# Altium PCB MJ_GPS-AT6558 V1.0.PcbDoc
Units mil, origin at the board's own origin, x right, y up, seen from the top; angles counter-clockwise.
Board outline 511.81 x 625.98 mil, 4 copper layers (Top Layer, GND, POWER, Bottom Layer), stack 30.709 mil thick; 29 components, 24 nets, 250 pads, 46 vias.
Unrouted connection lines stored in the file: 3.
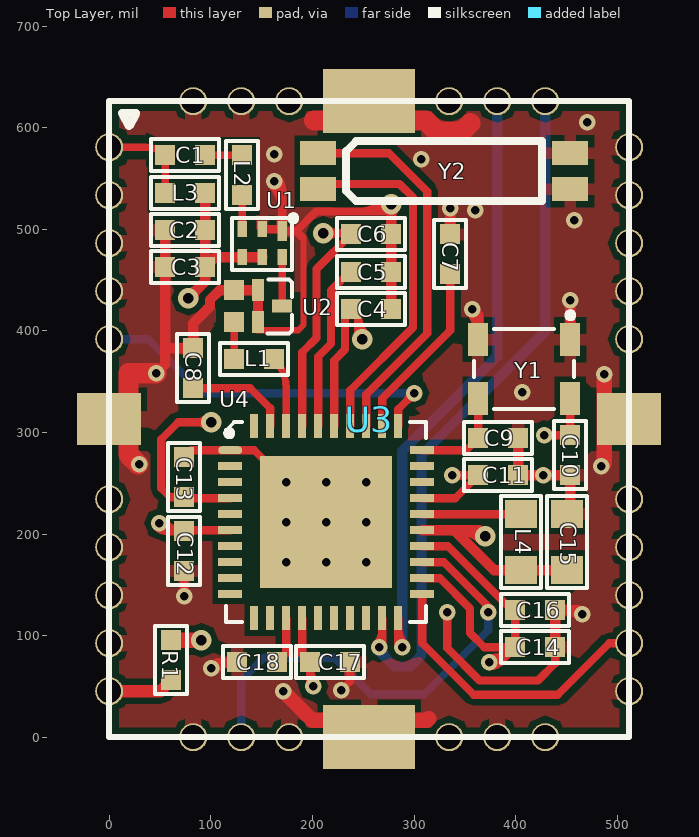
[diagram p0: Top Layer view]
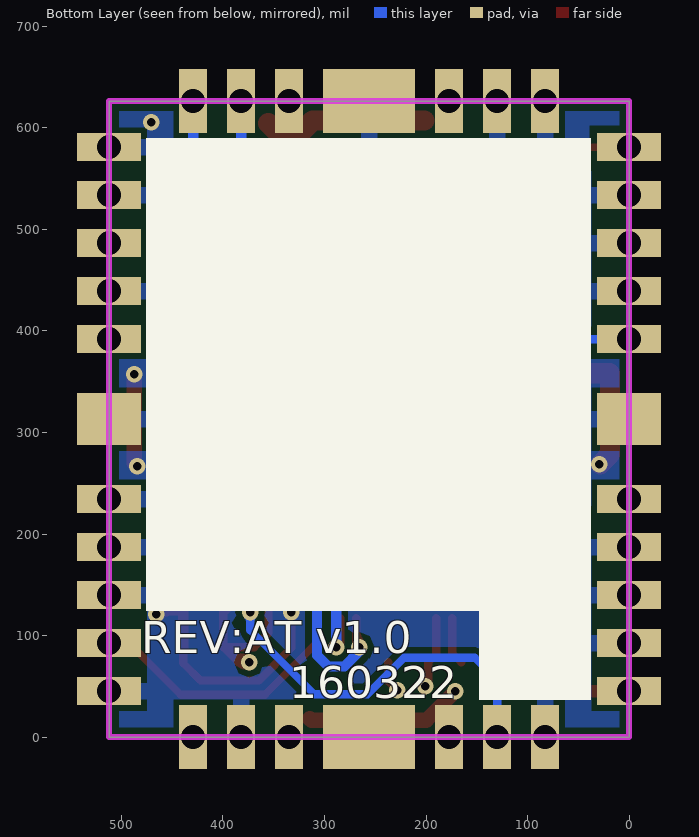
[diagram p1: Bottom Layer view, seen from below]
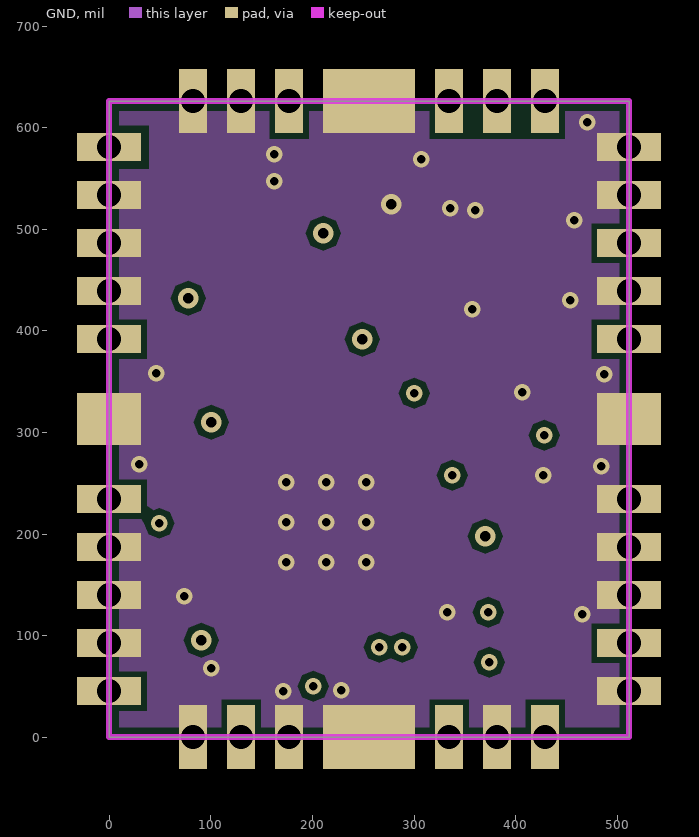
[diagram p2: GND]
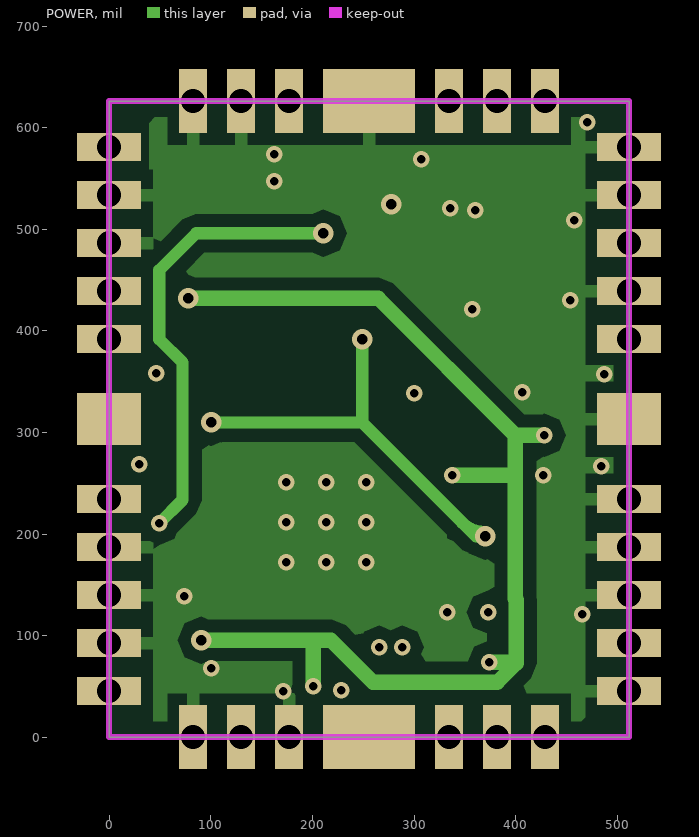
[diagram p3: POWER]

## Layer stack, top to bottom
Top Layer: signal copper 1.378
Dielectric: core 4.7244, FR-4, Dk 4.3
GND: signal copper 1.378
Dielectric: prepreg 15.748, FR-4, Dk 4.8
POWER: signal copper 1.378
Dielectric: core 4.7244, FR-4, Dk 4.3
Bottom Layer: signal copper 1.378

## Board outline
0,0 0,625.98 511.81,625.98 511.81,0

## Design rules (kind name [scope] priority, off if disabled: settings)
Clearance U4 [(InComponent('U4'))] p1: gap=6
Clearance "clearnce 50ohm" [(InNet('RF_IN') OR InNet('NetC1_2') OR InNet('NetL2_1') Or InNet('NetU1_6') Or InNet('NetL1_2') Or InNet('RFA_IN'))] p2: gap=7.87
Clearance KEEP-GND [(InComponent('U3')) vs OnLayer('Keep-Out Layer')] p3: gap=0
Clearance POWER [OnLayer('POWER')] p4: gap=11.81
Clearance [All] p5: gap=6
ComponentClearance [All] p1 off: gap=10 collisioncheckmode=3 verticalgap=10 showdistances=FALSE
Height [All] p1 off: minheight=0 maxheight=1000 prefheight=500
HoleToHoleClearance [All] p1: gap=7.87 allowstackedmicrovias=TRUE
MinimumSolderMaskSliver [All] p1 off: minsoldermaskwidth=7.87
NetAntennae [All] p1 off: netantennaetolerance=0
PolygonConnect GND [OnLayer('GND')] p1: connectstyle=Direct reliefconductorwidth=10 reliefentries=4 polygonreliefangle="90 Angle"
PolygonConnect isvia [IsVia vs InNet('GND')] p2: connectstyle=Direct reliefconductorwidth=10 reliefentries=4 polygonreliefangle="90 Angle"
PolygonConnect "Bottom Lyayer_GND" [InNet('GND') vs OnLayer('Bottom Layer')] p3: connectstyle=Relief reliefconductorwidth=15.75 reliefentries=4 polygonreliefangle="90 Angle"
PolygonConnect U3 [(InComponent('U3')) vs InNet('GND')] p4: connectstyle=Relief reliefconductorwidth=15.75 reliefentries=4 polygonreliefangle="90 Angle"
PolygonConnect [All] p5: connectstyle=Relief reliefconductorwidth=11.81 reliefentries=4 polygonreliefangle="90 Angle"
RoutingVias [All] p1: holewidth=8 width=16 viastyle="Through Hole" minholewidth=8 minwidth=16 maxholewidth=28 maxwidth=50
SilkToSilkClearance [All] p1 off: silktosilkclearance=10
SilkscreenOverComponentPads [All] p1 off: minsilkscreentomaskgap=10
SolderMaskExpansion [All] p1: expansion=1.97
Width RF_50ohm [(InNet('RF_IN') OR InNet('NetC1_2') OR InNet('NetL2_1') Or InNet('NetU1_6') Or InNet('NetL1_2') Or InNet('RFA_IN'))] p1: maxlimit=7 minlimit=7 preferedwidth=7
Width [All] p2: maxlimit=20 minlimit=6 preferedwidth=6
21 further rules are at their usual default settings.

## Components (designator, comment, footprint, x,y, rotation, side; value= is the part's Value field where it differs from the comment)
C1 "470pF/50V C0G" 0402 74.8,572.83 r0 top
C2 "100nF/25V X5R" 0402 74.8,499.02 r180 top
C3 "100nF/25V X5R" 0402 74.8,462.6 r0 top
C4 "1uF/10V X5R" 0402 257.87,421.26 r0 top
C5 "1uF/10V X5R" 0402 257.88,457.68 r180 top
C6 "1uF/10V X5R" 0402 257.88,495.08 r0 top
C7 "1uF/10V X5R" 0402 335.63,475.39 r90 top
C8 "1uF/10V X5R" 0402 82.68,363.19 r270 top
C9 "10pF/50V C0G/NC" 0402 382.87,294.29 r0 top
C10 "100nF/25V X5R" 0402 453.74,277.56 r270 top
C11 "1uF/10V X5R" 0402 382.87,257.87 r180 top
C12 "1uF/10V X5R" 0402 73.82,183.07 r270 top
C13 "100nF/25V X5R" 0402 73.82,255.91 r90 top
C14 "100nF/25V X5R" 0402 419.29,88.58 r0 top
C15 "10uF/6.3V X5R" 0603 450.79,191.93 r270 top
C16 "1uF/10V X5R" 0402 419.29,125 r180 top
C17 "1uF/10V X5R" 0402 217.52,73.82 r0 top
C18 "100nF/25V X5R" 0402 145.67,73.82 r180 top
L1 "4.3nH" 0402 142.72,372.05 r180 top
L2 "5.6nH" 0402 130.91,553.15 r90 top
L3 "47nH" 0402 74.8,535.43 r0 top
L4 "CIG10W4R7MNC/LQM18PN4R7MFR" 0603 405.51,191.93 r90 top
R1 "0R" 0402 61.02,75.79 r270 top
U1 "LX2659" dfn-6 150.59,486.22 r270 top
U2 "FAR-F6KA-1G5754-L4AJ" s1365 170.28,424.21 r180 top
U3 "MODULE-1613" MODULE-1613 255.91,312.99 r270 top locked
U4 "AT6558" AT6558 213.58,211.61 r0 top locked
Y1 "26MHZ" JZ_TCXO2520 408.46,362.21 r180 top
Y2 "32.768KHZ" JZ-MC146 329.72,557.09 r0 top

## Footprints (in the part's own frame and the unit in brackets; to place one, negate y for a bottom-side part, rotate by r counter-clockwise, add the part's x,y. Pads: shape width x height; smd on the part's side, far side on the other; paste and mask are expansions set on the pad)
0402 [mm]
  rect 0.5x0.5 smd: 1(-0.5,0) 2(0.5,0)
  silkscreen extent -0.85,-0.4 0.85,0.4
0603 [mm]
  rect 0.7x0.8 smd: 1(-0.7,0) 2(0.7,0)
  silkscreen extent -1.15,-0.5 1.15,0.5
AT6558 [mm]
  rect 3.3x3.3 smd: 0(0,0)
  oval 0.6x0.2 smd: 1(-2.4,1.8)
  rect 0.6x0.2 smd: 2(-2.4,1.4) 3(-2.4,1) 4(-2.4,0.6) 5(-2.4,0.2) 6(-2.4,-0.2) 7(-2.4,-0.6) 8(-2.4,-1) 9(-2.4,-1.4) 10(-2.4,-1.8) 21(2.4,-1.8) 22(2.4,-1.4) 23(2.4,-1) 24(2.4,-0.6) 25(2.4,-0.2) 26(2.4,0.2) 27(2.4,0.6) 28(2.4,1) 29(2.4,1.4) 30(2.4,1.8)
  rect 0.2x0.6 smd: 11(-1.8,-2.4) 12(-1.4,-2.4) 13(-1,-2.4) 14(-0.6,-2.4) 15(-0.2,-2.4) 16(0.2,-2.4) 17(0.6,-2.4) 18(1,-2.4) 19(1.4,-2.4) 20(1.8,-2.4) 31(1.8,2.4) 32(1.4,2.4) 33(1,2.4) 34(0.6,2.4) 35(0.2,2.4) 36(-0.2,2.4) 37(-0.6,2.4) 38(-1,2.4) 39(-1.4,2.4) 40(-1.8,2.4)
  silkscreen extent -2.5,-2.5 2.5,2.5
dfn-6 [mm]
  rect 0.5x0.23 smd: 1(-0.3,0.5)
  rect 0.4x0.23 smd: 2(-0.35,0) 3(-0.35,-0.5) 5(0.35,0) 6(0.35,0.5)
  rect 0.4x0.23 smd mask+0.05: 4(0.35,-0.5)
  silkscreen extent -0.7,-0.75 0.68,0.85
JZ-MC146 [mm]
  rect 0.9x0.6 smd: 1(-3.15,-0.45) 2(3.15,-0.45) 3(3.15,0.45) 4(-3.15,0.45)
  silkscreen extent -2.45,-0.75 2.45,0.75
JZ_TCXO2520 [mm]
  rect 0.5x0.825 smd: 1(-1.15,-0.737) 2(1.15,-0.737) 3(1.15,0.737) 4(-1.15,0.737)
  silkscreen extent -1.25,-1.42 1.25,1
MODULE-1613 [mm]
  rect 0.7x1.6 smd far side: 1(-6.8,-6.5) 2(-5.6,-6.5) 3(-4.4,-6.5) 4(-3.2,-6.5) 5(-2,-6.5) 7(2,-6.5) 8(3.2,-6.5) 9(4.4,-6.5) 10(5.6,-6.5) 11(6.8,-6.5) 19(6.8,6.5) 20(5.6,6.5) 21(4.4,6.5) 22(3.2,6.5) 23(2,6.5) 25(-2,6.5) 26(-3.2,6.5) 27(-4.4,6.5) 28(-5.6,6.5) 29(-6.8,6.5)
  round 0.7 hole 0.6: 1(-6.8,-6.5) 2(-5.6,-6.5) 3(-4.4,-6.5) 4(-3.2,-6.5) 5(-2,-6.5) 7(2,-6.5) 8(3.2,-6.5) 9(4.4,-6.5) 10(5.6,-6.5) 11(6.8,-6.5) 12(7.95,-4.4) 13(7.95,-3.2) 14(7.95,-2) 16(7.95,2) 17(7.95,3.2) 18(7.95,4.4) 19(6.8,6.5) 20(5.6,6.5) 21(4.4,6.5) 22(3.2,6.5) 23(2,6.5) 25(-2,6.5) 26(-3.2,6.5) 27(-4.4,6.5) 28(-5.6,6.5) 29(-6.8,6.5) 30(-7.95,4.4) 31(-7.95,3.2) 32(-7.95,2) 34(-7.95,-2) 35(-7.95,-3.2) 36(-7.95,-4.4)
  rect 1.3x1.6 smd: 6(0,-6.5) 24(0,6.5)
  rect 1.3x1.6 smd far side: 6(0,-6.5) 24(0,6.5)
  rect 1.6x0.7 smd far side: 12(7.95,-4.4) 13(7.95,-3.2) 14(7.95,-2) 16(7.95,2) 17(7.95,3.2) 18(7.95,4.4) 30(-7.95,4.4) 31(-7.95,3.2) 32(-7.95,2) 34(-7.95,-2) 35(-7.95,-3.2) 36(-7.95,-4.4)
  rect 1.6x2.3 smd: 15(7.95,0) 33(-7.95,0)
  rect 1.6x2.3 smd far side: 15(7.95,0) 33(-7.95,0)
  silkscreen extent -7.95,-6.5 7.95,6.5
s1365 [mm]
  rect 0.5x0.325 smd mask+0.05: 1(0,0)
  rect 0.3x0.55 smd mask+0.05: 2(0.61,-0.4) 5(0.61,0.4)
  rect 0.5x0.5 smd mask+0.05: 3(1.21,-0.4) 4(1.21,0.4)
  silkscreen extent -0.25,-0.66 0.36,0.68

## Part data
C1 C2 C3 C4 C5 C6 C7 C8 C9 C10 C11 C12 C13 C14 C15 C16 C17 C18: library part CB
L1 L2 L3: library part L1
L4: library part L1, "SAMSUNG/MURATA"
R1: library part R
U2: library part "SAW FILTER 1575"
U4: "AT6558 QFN40 5*5*0.8"
Y1: library part XTAL

## Free pads (board coordinates)
  rect 62.99x27.56 on Mid1: 1(0,580.71) 2(0,533.46) 3(0,486.22) 4(0,438.98) 5(0,391.73) 7(0,234.25) 8(0,187.01) 9(0,139.76) 10(0,92.52) 11(0,45.28) 19(511.81,45.28) 20(511.81,92.52) 21(511.81,139.76) 22(511.81,187.01) 23(511.81,234.25) 25(511.81,391.73) 26(511.81,438.98) 27(511.81,486.22) 28(511.81,533.46) 29(511.81,580.71)
  rect 62.99x27.56 on Mid2: 1(0,580.71) 2(0,533.46) 3(0,486.22) 4(0,438.98) 5(0,391.73) 7(0,234.25) 8(0,187.01) 9(0,139.76) 10(0,92.52) 11(0,45.28) 19(511.81,45.28) 20(511.81,92.52) 21(511.81,139.76) 22(511.81,187.01) 23(511.81,234.25) 25(511.81,391.73) 26(511.81,438.98) 27(511.81,486.22) 28(511.81,533.46) 29(511.81,580.71)
  rect 62.99x51.18 on Mid1: 6(0,312.99) 24(511.81,312.99)
  rect 62.99x51.18 on Mid2: 6(0,312.99) 24(511.81,312.99)
  rect 27.56x62.99 on Mid1: 12(82.68,0) 13(129.92,0) 14(177.17,0) 16(334.65,0) 17(381.89,0) 18(429.13,0) 30(429.13,625.98) 31(381.89,625.98) 32(334.65,625.98) 34(177.17,625.98) 35(129.92,625.98) 36(82.68,625.98)
  rect 27.56x62.99 on Mid2: 12(82.68,0) 13(129.92,0) 14(177.17,0) 16(334.65,0) 17(381.89,0) 18(429.13,0) 30(429.13,625.98) 31(381.89,625.98) 32(334.65,625.98) 34(177.17,625.98) 35(129.92,625.98) 36(82.68,625.98)
  rect 90.55x62.99 on Mid1: 15(255.91,0) 33(255.91,625.98)
  rect 90.55x62.99 on Mid2: 15(255.91,0) 33(255.91,625.98)

## Via types
v1: diameter 16, hole 8, Top Layer to Bottom Layer, 39 vias
v2: diameter 20, hole 10, Top Layer to Bottom Layer, 7 vias

## Nets (pads, with @x,y where several pads share a name; then routed paths per layer and width w, separated by ;. In a path a pad name is that pad's centre, name@x,y a point inside that pad or via, vN(x,y) a via of type N, cw(c..) or ccw(c..) an arc to the next point about the centre after c; other vN are vias at no path point)
1.2V: C18.1 U4.13 | length 47
  Top Layer w8: C18.1 174.21,82.68 U4.13
1PPS: pad.20 U3.20 U4.21 | length 281
  Top Layer w8: U4.21 308.07,92.54 358.79,41.82 441.43,41.82 492.13,92.52 U3.20@498.86,92.52
+3.3V: pad.11 R1.2 U3.11 | length 65.5
  Top Layer w12: U3.11@0,45.28 50.2,45.28 R1.2
AVDD: C6.1 C12.1 U4.6 U4.37 | length 813.3
  Top Layer w8: v1@46.08,208.14 ccw(c57.24,217.01) 57.24,202.76 ; v1(49.21,210.63) 57.09,202.76 C12.1 cw(c73.82,230.18) v1@52.34,213.12 ; C12.1@74.8,203.74 U4.6 ; U4.37 189.96,378.94 204.12,393.09 204.12,461.01 C6.1 ; v2(210.63,496.06) C6.1@238.19,496.06 ; v2@214.87,491.82 cw(c225.12,481.58) 225.12,496.06 cw(c225.12,510.55) v2@214.87,500.31
  POWER w12: v1(49.21,210.63) 72.07,233.49 72.07,368.98 49.31,391.74 49.31,459.74 85.63,496.06 v2(210.63,496.06)
G_RX: pad.31 U3.31 U4.20 | length 624.5
  Top Layer w8: U4.20@284.45,107.75 ccw(c307.55,107.75) v1@291.21,91.41 ; U4.20 284.45,92.52 v1(288.39,88.58)
  Bottom Layer w10: v1(288.39,88.58) 288.39,281.5 381.89,375 U3.31@381.89,625.98
G_TX: pad.30 U3.30 U4.19 | length 711.3
  Top Layer w8: v1@262.92,91.41 ccw(c248.97,105.36) U4.19@268.7,105.36 ; v1(265.75,88.58) 268.7,91.53 U4.19
  Bottom Layer w10: v1(265.75,88.58) 265.75,84.35 280.52,69.58 296.26,69.58 307.39,80.71 307.39,277.87 429.13,399.62 U3.30@429.13,625.98 ; v1@268.75,88.58 ccw(c286.21,88.58) 273.86,76.24
GND: C2.2 C3.1 C4.2 C5.1 C6.2 C7.2 C8.1 C9.2 C10.2 C11.1 C12.2 C13.2 C14.2 C15.1 C16.1 C17.2 C18.2 pad.2 pad.3 pad.4 pad.6 pad.8 pad.9 pad.10 pad.12 pad.14 pad.15 pad.17 pad.19 pad.21 pad.22 pad.23 pad.24 pad.26 pad.28 pad.29 pad.33 pad.35 pad.36 U1.1 U1.2 U2.2 U2.3 U2.5 U3.2 U3.3 U3.4 U3.6 U3.8 U3.9 U3.10 U3.12 U3.14 U3.15 U3.17 U3.19 U3.21 U3.22 U3.23 U3.24 U3.26 U3.28 U3.29 U3.33 U3.35 U3.36 U4.0 U4.1 Y1.1 Y1.2 Y2.2 Y2.3 | length 2239
  Top Layer w6: U2.5@145.67,400.59 186.02,400.59 191.12,405.68 191.12,490.97
  Top Layer w8: v1@70.99,141.61 ccw(c64.16,148.44) 73.82,148.44 ccw(c83.48,148.44) v1@76.65,141.61 ; v1(73.82,138.78) C12.2 ; C13.2 80.71,282.48 U4.1 142.71,282.48 v1(213.58,211.61) ; v1(100.39,67.91) 106.3,73.82 C18.2 ; v1@103.22,65.09 cw(c124.31,44) C18.2@124.31,73.82 ; U2.5 U2.5@146.91,407.82 ; U1.2 U1.1@168.31,500 ; v1@159.57,544.42 cw(c133.74,518.58) 170.28,518.58 ; v1(162.4,547.24) 170.28,539.37 U1.1 ; v1@165.23,550.07 cw(c153.05,537.89) 170.28,537.89 ; U4.0@170.21,250.98 ccw(c160.55,250.98) 167.38,257.81 ccw(c174.21,264.64) U4.0@174.21,254.98 ; U1.1@171.23,498.03 184.06,498.03 ; U4.0@174.21,246.98 cw(c174.21,237.33) 181.04,244.16 cw(c187.87,250.98) U4.0@178.21,250.98 ; 190.12,491.97 184.06,498.03 ; U4.0@209.58,211.61 ccw(c199.92,211.61) 206.75,218.44 ccw(c213.58,225.27) U4.0@213.58,215.61 ; v1(228.36,46.26) 237.2,55.11 C17.2 ; 246.06,517.56 ccw(c246.06,556.1) v2@273.32,528.85 ; 265.38,517.56 ccw(c265.38,536.79) v2@278.97,523.19 ; v2(277.56,524.61) 270.51,517.56 203.58,517.56 184.06,498.03 ; v1@329.85,120.2 cw(c323.02,113.37) 332.68,113.37 cw(c342.33,113.37) v1@335.51,120.2 ; v1(332.68,123.03) 332.68,87.73 364.59,55.82 421.96,55.82 438.98,72.84 C14.2
  Top Layer w10: v1(46.26,358.29) 55.12,367.14 55.12,379.81 ; C2.2 C3.1 55.12,379.81 ; U2.5 U2.2 U2.3 108.7,439.96 99.07,430.33 99.07,423.7 82.68,407.31 C8.1 58.18,382.87 55.12,379.81 ; v2@274.02,521.07 cw(c265.49,512.53) 277.56,512.53 cw(c289.63,512.53) v2@281.1,521.07 ; C4.2 C6.2 v2(277.56,524.61) ; C7.2 v1(335.63,520.67) ; v1@355.16,419.14 cw(c335.78,399.76) Y1.2@363.19,399.76 ; v1(357.28,421.26) 363.19,415.35 Y1.2 ; C9.2 C11.1 C10.2 453.74,222.44 C15.1 ; C14.2 C16.1 461.62,125 v1(465.55,121.06) ; C16.1@448.81,125 cw(c448.81,104.32) v1@463.43,118.94 ; Y1.1 v1(453.74,430.12)
  Top Layer w15: v1(171.26,45.28) 199.8,16.73 312.8,16.73 314.37,18.31 ; v1(484.25,266.73) 487.2,269.68 v1(487.2,357.28)
  Top Layer w20: 18.95,358.27 18.95,278.29 v1@28.54,268.7 ; 18.97,358.29 v1(46.26,358.29) ; 201.52,607.03 311.48,607.03 322.31,596.2 346.98,596.2 355.21,604.43
  other v1: 174.21,172.24 213.58,172.24 252.95,172.24 174.21,211.61 252.95,211.61 174.21,250.98 213.58,250.98 252.95,250.98 427.17,257.87 29.53,268.7 406.5,339.57 457.68,508.86 360.24,518.7 307.09,568.9 162.4,573.82 470.47,605.32
NetC1_2: C1.2 L2.2 | length 36.7
  Top Layer w7: C1.2@94.49,571.85 cw(c96.86,569.47) 96.86,572.83 L2.2
NetC5_2: C5.2 U4.36 | length 171.3
  Top Layer w8: U4.36 205.71,374.88 218.12,387.3 218.12,439.57 238.19,459.65 C5.2@233.87,459.65
NetC7_1: C7.1 U4.32 | length 177.3
  Top Layer w8: U4.32 268.7,333.43 335.63,400.36 C7.1
NetC8_2: C8.2 U4.39 | length 101.7
  Top Layer w8: C8.2 138.78,343.5 158.46,323.82 U4.39
NetC9_1: C9.1 U4.30 Y1.3 | length 98.9
  Top Layer w8: U4.30 351.38,282.48 C9.1 Y1.3
NetL1_2: L1.2 U2.4 | length 36.4
  Top Layer w7: L1.2 U2.4@123.03,408.46
NetL2_1: L2.1 U1.3 | length 33.5
  Top Layer w7: U1.3 L2.1
NetL4_2: L4.2 U4.26 | length 97.4
  Top Layer w8: U4.26 L4.2
NetU1_6: U1.6 U2.1 | length 48.2
  Top Layer w7: U2.1 U1.6
NetU4_33: U4.33 Y2.4 | length 377.9
  Top Layer w8: Y2.4@206.69,574.8 275.45,574.8 312.99,537.26 312.99,397.52 252.95,337.48 U4.33
NetU4_34: U4.34 Y2.1 | length 351
  Top Layer w8: Y2.1@206.69,540.35 206.69,541.34 209.96,544.61 285.84,544.61 298.99,531.46 298.99,403.32 237.2,341.54 U4.34
RF_IN: C1.1 L3.1 pad.1 U3.1 | length 92.7
  Top Layer w7: U3.1@0,580.71 36.11,580.71 cw(c36.11,553.83) C1.1 ; L3.1 C1.1@55.12,570.87
RFA_IN: L1.1 U4.38 | length 69.1
  Top Layer w7: L1.1 cw(c133.89,343.54) 174.21,343.54 U4.38
RST: pad.13 U3.13 U4.23 | length 470.9
  Top Layer w8: U4.23 329.5,172.24 373.05,128.69 v1(373.05,123.04)
  Bottom Layer w8: U3.13@129.92,0 129.92,56.08 152.11,78.26 221.81,78.26 257.75,42.32 310.04,42.32 373.05,105.33 v1(373.05,123.04) ; v1@370.22,120.21 cw(c363.39,113.38) 373.05,113.38 cw(c382.71,113.38) v1@375.88,120.21
V_BAT: pad.5 U3.5 U4.31 | length 391.6
  Top Layer w8: U4.31 284.45,322.83 v1(300.21,338.6) ; v1@296.21,338.6 cw(c286.55,338.6) 293.38,331.77 cw(c300.21,324.94) v1@300.21,334.6
  Bottom Layer w8: U3.5@0,391.73 38.39,391.73 91.52,338.6 v1(300.21,338.6) ; v1@297.38,335.77 ccw(c290.55,328.94) 290.55,338.6 ccw(c290.55,348.26) v1@297.38,341.43
VCC33: C2.1 C3.2 C10.1 C11.2 C14.1 C16.2 C17.1 L3.2 R1.1 U1.4 U1.5 U4.14 U4.22 U4.24 U4.27 Y1.4 | length 1963.8
  Top Layer w8: U4.14 189.96,81.69 C17.1 197.83,53.16 v1(200.8,50.2) ; C17.1@197.83,67.01 ccw(c217.61,67.01) v1@203.63,53.03 ; U4.22 325.45,156.5 355.05,126.9 355.05,102.63 369.09,88.58 C14.1 ; U4.24 333.55,187.99 396.54,125 C16.2 C14.1 ; U4.27 340.55,235.24 C11.2 v1(337.6,257.87) ; v1@340.43,255.05 cw(c347.26,248.22) 347.26,257.87 cw(c347.26,267.53) v1@340.43,260.7 ; v1@374.02,69.82 ccw(c374.02,86.3) 385.67,74.65 ; v1(374.02,73.82) 384.84,73.82 C14.1 ; v1@374.02,77.82 ccw(c374.02,113.62) C14.1@399.33,88.3 ; v1@376.84,70.99 cw(c383.67,64.16) 383.67,73.82 cw(c383.67,83.48) v1@376.84,76.65 ; v1(428.15,297.24) C10.1 Y1.4 ; v1@430.98,294.42 cw(c437.81,287.59) 437.81,297.24 cw(c437.81,306.9) v1@430.98,300.07
  Top Layer w10: v2(77.76,432.09) 94.49,448.82 C3.2 ; v2@77.76,437.09 ccw(c77.76,449.16) 86.29,440.62 ccw(c94.83,432.09) v2@82.76,432.09 ; L3.2 C2.1 C3.2 ; U1.5 U1.4 104.33,472.44 C3.2
  Top Layer w15: R1.1 v2(90.55,95.47)
  POWER w15: v2(77.76,432.09) 264.76,432.09 399.67,297.18 ; v2(90.55,95.47) 200.79,95.47 ; v1(200.8,50.2) 200.8,95.46 ; v1(337.6,257.87) 399.67,257.89 ; v1(374.02,73.82) 399.52,73.82 400.55,72.79 ; v1(428.15,297.24) 399.67,297.18 ; 200.79,95.47 218.39,95.47 259.73,54.13 381.89,54.13 400.55,72.79 ; 399.67,257.89 399.67,297.18 ; 399.67,257.89 399.67,136.2 400.55,135.31 400.55,72.79
VDC: C4.1 C13.1 C15.2 L4.1 U4.4 U4.25 U4.35 | length 1019.9
  Top Layer w8: C13.1 60.04,236.22 51.18,245.08 51.18,293.31 67.93,310.05 v2(100.4,310.05) ; C13.1@74.8,235.24 U4.4 ; v2@96.16,305.81 ccw(c85.91,295.57) 85.91,310.05 ccw(c85.91,324.54) v2@96.16,314.3 ; U4.35 221.45,370.83 232.12,381.5 232.12,419.96 235.38,423.23 C4.1@238.19,423.23 ; C4.1 C4.1@245.08,414.37 ; v2(249.02,391.73) 245.08,395.67 C4.1@245.08,414.37 ; v2@253.08,396.15 cw(c269.83,414.37) C4.1@245.08,414.37
  Top Layer w10: U4.25 339.57,203.74 ; 343.75,203.74 cw(c343.75,171.51) v2@366.54,194.3 ; v2@364.17,203.74 339.57,203.74 ; C15.2 L4.1 378.94,164.37 339.57,203.74
  POWER w12: v2@99.2,310.05 v2(100.4,310.05) 100.77,309.69 249.02,309.69 ; v2@103.23,312.88 ccw(c110.94,320.6) 110.94,309.69 ; v2(249.02,391.73) 249.02,309.69 ; 347.53,211.18 ccw(c370.08,233.73) v2@370.08,201.83 ; v2(370.08,197.83) 360.87,197.83 249.02,309.69
pads on no net: U3.7 U3.16 U3.18 U3.25 U3.27 U3.32 U3.34 U4.2 U4.3 U4.5 U4.7 U4.8 U4.9 U4.10 U4.11 U4.12 U4.15 U4.16 U4.17 U4.18 U4.28 U4.29 U4.40

## Polygon pours and split planes (outlines as drawn)
GND on Top Layer "Bottom Layer-No Net" (solid, remove dead copper): 0,0 0,625.98 511.81,625.98 511.81,0 0,0
GND on GND "Bottom Layer-No Net" (solid, remove dead copper): 0,0 0,625.98 511.81,625.98 511.81,0 0,0
GND on POWER "Bottom Layer-No Net" (solid, remove dead copper): 0,0 0,625.98 511.81,625.98 511.81,0 0,0
GND on Bottom Layer "Bottom Layer-No Net" (solid, remove dead copper): 0,0 0,625.98 512.8,625.98 511.81,625 511.81,0 0,0

## Keep-outs
Keep-Out Layer:
  the board outline again, w5.91

## Other copper
Top Layer:
  text "TOP" at 651.57,555.12 h31.5
GND:
  text "GND" at 651.57,495.08 h31.5
POWER:
  text "POWER" at 652.56,429.13 h31.5
Bottom Layer:
  text "BOTTOM" at 650.59,367.13 h31.5

## Silkscreen, mask and mechanical layers (free items; w line width, h text height)
Bottom Overlay:
  rectangle: 37.4,36.42 147.64,126.97
  rectangle: 37.4,124.02 475.39,589.57
  text "REV:AT v1.0" at 480.32,82.68 h31.5
  text "160322" at 334.65,38.39 h31.5